# Altium PCB LXF1768.PcbDoc (part 5 of 5)
Units mil, origin at the board's own origin, x right, y up, seen from the top; angles counter-clockwise.
Board outline 3899 x 3079 mil, 2 copper layers (Top Layer, Bottom Layer); 52 components, 108 nets, 388 pads, 52 vias.
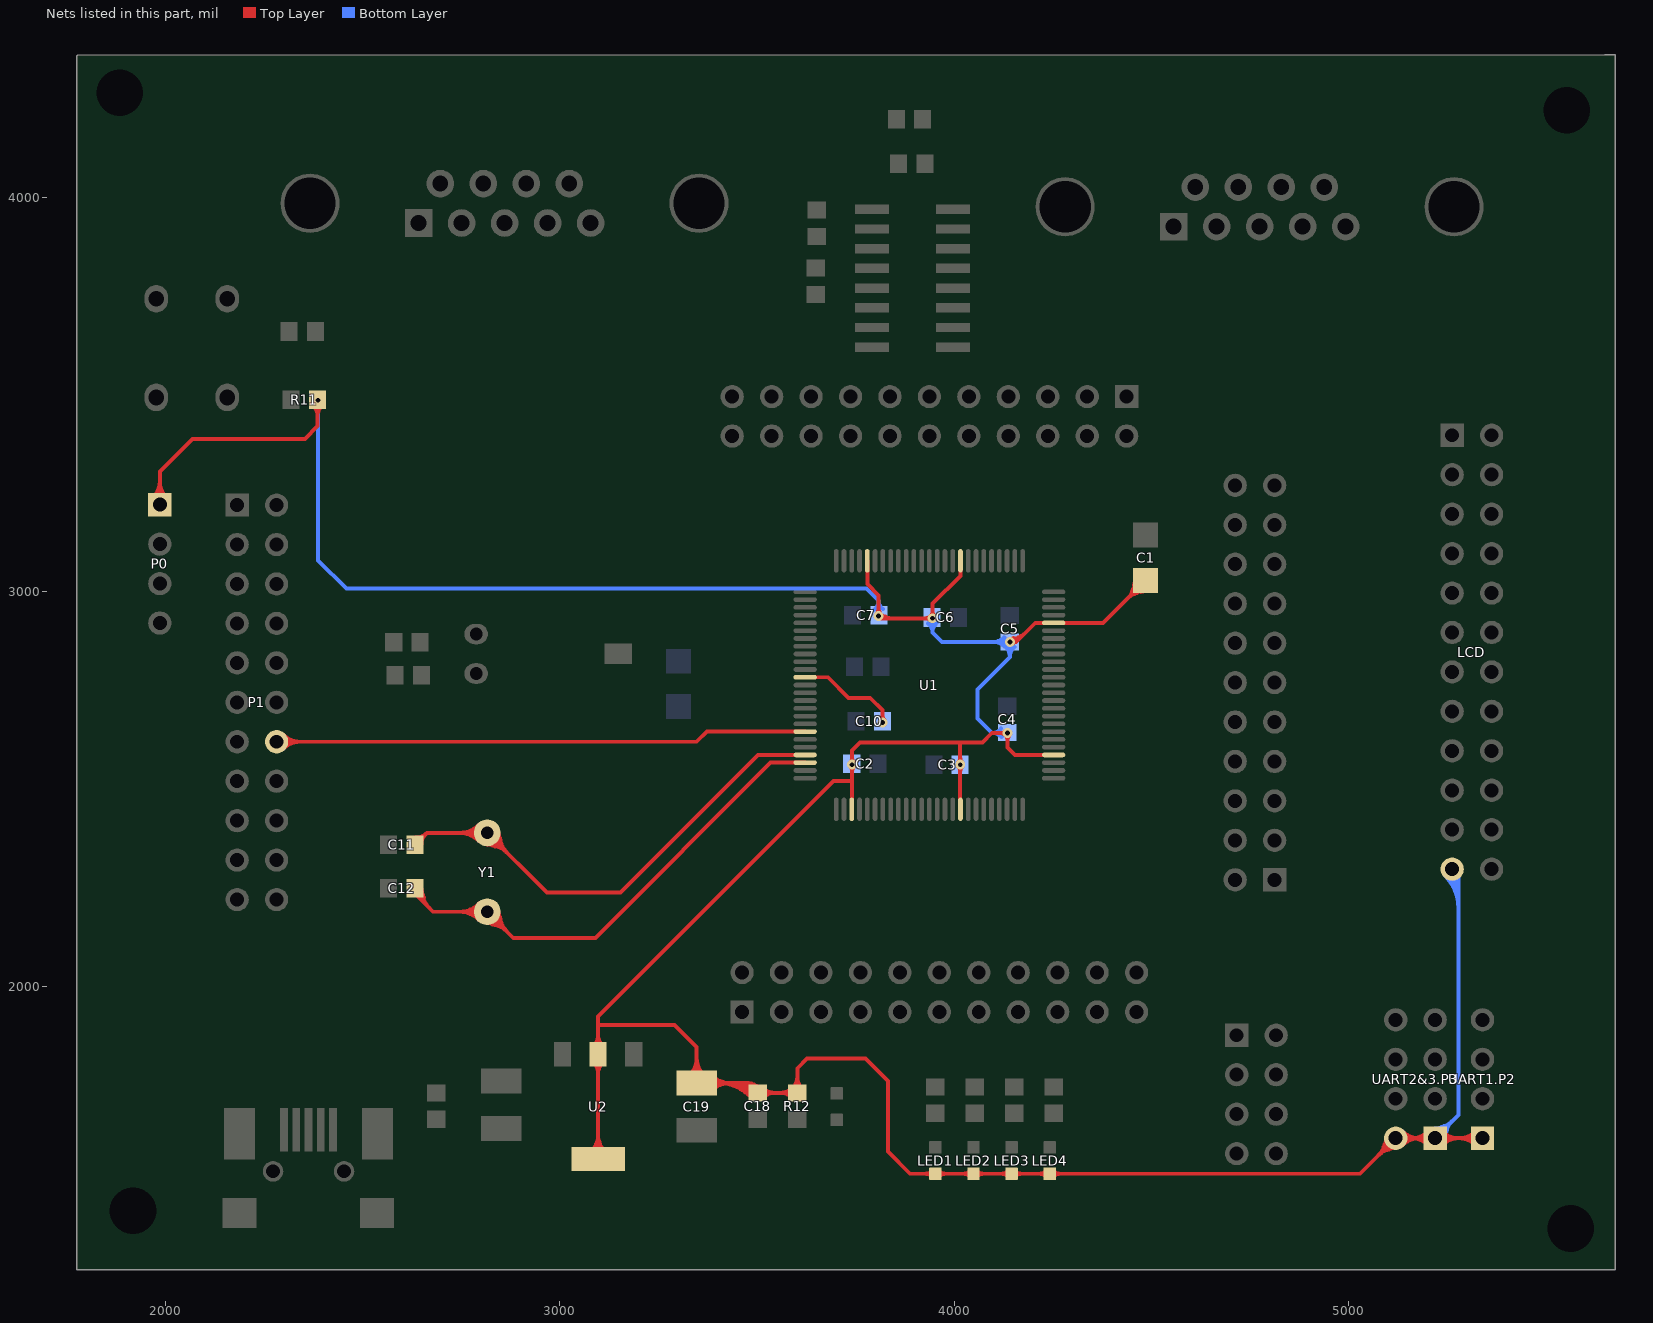
[diagram p5: the nets of this part, all layers, seen from the top]

## Via types
v1: diameter 25, hole 12, Top Layer to Bottom Layer, 27 vias
v2: diameter 24, hole 12, Top Layer to Bottom Layer, 25 vias

## Nets (pads, with @x,y where several pads share a name; then routed paths per layer and width w, separated by ;. In a path a pad name is that pad's centre, name@x,y a point inside that pad or via, vN(x,y) a via of type N, cw(c..) or ccw(c..) an arc to the next point about the centre after c; other vN are vias at no path point) (continued)
VBAT: P1.14 U1.19 | length 1646.8
  Top Layer w10: P1.14@2282,2620 3347,2620 3372.67,2645.67 U1.19@3622,2645.67 ; 2317.07,2620 cw(c2317.07,2655.07) 2292.27,2630.27 ccw(c2317.07,2655.07) 2317.07,2620 ; 2317.07,2620 ccw(c2317.07,2584.93) 2292.27,2609.73 cw(c2317.07,2584.93) 2317.07,2620 ; 2341.21,2620 cw(c2341.21,2679.21) 2299.34,2637.34 ccw(c2341.21,2679.21) 2341.21,2620 ; 2341.21,2620 ccw(c2341.21,2560.79) 2299.34,2602.66 cw(c2341.21,2560.79) 2341.21,2620
VDD3.3: C1.1 C2.1 C3.1 C4.1 C5.1 C6.1 C7.1 C18.1 C19.1 LCD.23 LED1.1 LED2.1 LED3.1 LED4.1 P0.1 pad.EndPad@2385.93,3487 pad.StartPad@3741,2562 R11.2 R12.1 U1.28 U1.42 U1.54 U1.71 U1.84 U1.96 U2.2 U2.4 UART1.P2.1 UART2&3.P3.1 UART2&3.P3.2 | length 17897.7
  Top Layer w10: P0.1@1986,3221 1986,3305 2069,3388 2354,3388 2385.93,3419.93 pad.EndPad@2385.93,3487 ; U2.4@3097,1562.13 U2.2@3097,1827.87 U2.2@3097,1846 ; 3099,1902 3291,1902 3347,1846 C19.1@3347,1755 3477,1755 ; 3453.76,1749.51 ccw(c3478.22,1791.51) C18.1@3494.47,1745.7 ; 3457.68,1739.69 ccw(c3471.68,1759.63) C18.1@3488.52,1742.03 ; 3466.14,1753.3 cw(c3448.36,1722.51) C18.1@3483.55,1727.61 ; 3467.64,1732.7 ccw(c3480.25,1750.67) C18.1@3495.43,1734.81 ; 3472.4,1738.65 ccw(c3487.67,1764.87) C18.1@3497.81,1736.27 ; 3473.59,1749 ccw(c3488.17,1774.26) C18.1@3495.72,1746.09 ; 3475.47,1736.86 cw(c3466.29,1721.1) C18.1@3483.93,1725.75 ; 3477.6,1725.71 ccw(c3488.83,1741.7) C18.1@3502.35,1727.58 ; C18.1@3488.44,1751.58 cw(c3481.32,1739.26) C18.1@3494.07,1732.95 ; U1.28@3740.11,2448.82 3741,2449.71 3741,2521 ; U1.96@3779.48,3078.74 3779.48,3019.52 3808,2991 v1(3808,2939) 3814,2933 v1(3945,2933) 3945,2970 4015.7,3040.7 U1.84@4015.7,3078.74 ; v1@3813.7,2934.13 cw(c3821.71,2927.28) 3826.98,2936.41 ; U1.42@4015.7,2448.82 4015,2449.52 v1(4015,2562) 4015,2618 ; v1@4138.83,2874.25 cw(c4155.03,2864.9) 4150.19,2882.96 ; v1(4141,2873) 4157,2873 ; v1@4147.5,2869.25 cw(c4184.6,2847.83) 4173.51,2889.21 ; U1.54@4251.92,2586.61 4153.39,2586.61 4135,2605 v1(4135,2642) 4095,2642 4071,2618 4015,2618 ; 4451.03,3001.1 cw(c4493.02,2989.84) C1.1@4484.3,3032.43 ; C1.1@4455.22,3016.73 cw(c4489.39,3007.57) C1.1@4482.29,3042.23 ; 4457.1,2995.03 ccw(c4445.84,3037.02) C1.1@4488.43,3028.3 ; C1.1@4472.73,2999.22 ccw(c4463.57,3033.39) C1.1@4498.23,3026.29 ; C1.1@4485,3029 4377.26,2921.26 U1.71@4251.92,2921.26 4205.26,2921.26 4157,2873 ; 5088.48,1592.65 cw(c5125.61,1582.7) UART2&3.P3.2@5117.9,1620.36 ; 5096.65,1584.48 ccw(c5086.7,1621.61) UART2&3.P3.2@5124.36,1613.9 ; UART1.P2.1@5339,1615 UART2&3.P3.1@5219,1615 UART2&3.P3.2@5119,1615 5028.85,1524.85 LED4.1@4241.98,1524.85 LED3.1@4145.31,1524.85 LED2.1@4048.65,1524.85 LED1.1@3951.98,1524.85 3888.15,1524.85 3832,1581 3832,1760 3775,1817 3627,1817 3602,1792 R12.1@3602,1730 C18.1@3502,1730 3477,1755 ; 1986,3256.07 cw(c1950.93,3256.07) 1975.73,3231.27 ccw(c1950.93,3256.07) 1986,3256.07 ; 1986,3256.07 ccw(c2021.07,3256.07) 1996.27,3231.27 cw(c2021.07,3256.07) 1986,3256.07 ; 1986,3280.21 cw(c1926.79,3280.21) 1968.66,3238.34 ccw(c1926.79,3280.21) 1986,3280.21 ; 1986,3280.21 ccw(c2045.21,3280.21) 2003.34,3238.34 cw(c2045.21,3280.21) 1986,3280.21 ; 2385.93,3444.83 cw(c2426.13,3444.83) 2397.7,3473.26 ccw(c2426.13,3444.83) 2385.93,3444.83 ; 2385.93,3444.83 ccw(c2345.72,3444.83) 2374.15,3473.26 cw(c2345.72,3444.83) 2385.93,3444.83 ; 3097,1599.57 cw(c3059.55,1599.57) 3086.03,1573.09 ccw(c3059.55,1599.57) 3097,1599.57 ; 3097,1599.57 ccw(c3134.45,1599.57) 3107.97,1573.09 cw(c3134.45,1599.57) 3097,1599.57 ; 3097,1623.72 cw(c3035.41,1623.72) 3078.96,1580.17 ccw(c3035.41,1623.72) 3097,1623.72 ; 3097,1623.72 ccw(c3158.59,1623.72) 3115.04,1580.17 cw(c3158.59,1623.72) 3097,1623.72 ; 3097,1778.81 cw(c3137.21,1778.81) 3108.78,1807.24 ccw(c3137.21,1778.81) 3097,1778.81 ; 3097,1778.81 ccw(c3056.79,1778.81) 3085.22,1807.24 cw(c3056.79,1778.81) 3097,1778.81 ; 3097,1861 cw(c3087.65,1861) 3091.01,1852.27 ccw(c3087.65,1861) 3097,1861 ; 3097,1861 ccw(c3106.35,1861) 3102.99,1852.27 cw(c3106.35,1861) 3097,1861 ; 3097,1861 3097,1924 3694,2521 3741,2521 ; 3097,1876.94 cw(c3056.79,1876.94) 3085.22,1848.51 ccw(c3056.79,1876.94) 3097,1876.94 ; 3097,1876.94 ccw(c3137.21,1876.94) 3108.78,1848.51 cw(c3137.21,1876.94) 3097,1876.94 ; 3347,1794.82 cw(c3307.18,1794.82) 3335.34,1766.66 ccw(c3307.18,1794.82) 3347,1794.82 ; 3347,1794.82 ccw(c3386.82,1794.82) 3358.66,1766.66 cw(c3386.82,1794.82) 3347,1794.82 ; 3347,1818.97 cw(c3283.03,1818.97) 3328.26,1773.74 ccw(c3283.03,1818.97) 3347,1818.97 ; 3347,1818.97 ccw(c3410.97,1818.97) 3365.74,1773.74 cw(c3410.97,1818.97) 3347,1818.97 ; 3406.51,1755 cw(c3406.51,1794.82) 3378.35,1766.66 ccw(c3406.51,1794.82) 3406.51,1755 ; 3406.51,1755 ccw(c3406.51,1715.18) 3378.35,1743.34 cw(c3406.51,1715.18) 3406.51,1755 ; 3430.65,1755 cw(c3430.65,1818.97) 3385.42,1773.74 ccw(c3430.65,1818.97) 3430.65,1755 ; 3430.65,1755 ccw(c3430.65,1691.03) 3385.42,1736.26 cw(c3430.65,1691.03) 3430.65,1755 ; 3477,1755 cw(c3459.8,1737.8) 3483.68,1733.17 ccw(c3459.8,1737.8) 3477,1755 ; 3477,1755 ccw(c3497.34,1775.34) 3499.05,1746.62 cw(c3497.34,1775.34) 3477,1755 ; 3544.17,1730 cw(c3544.17,1770.21) 3515.74,1741.78 ccw(c3544.17,1770.21) 3544.17,1730 ; 3544.17,1730 ccw(c3544.17,1689.79) 3515.74,1718.22 cw(c3544.17,1689.79) 3544.17,1730 ; 3559.83,1730 cw(c3559.83,1689.79) 3588.26,1718.22 ccw(c3559.83,1689.79) 3559.83,1730 ; 3559.83,1730 ccw(c3559.83,1770.21) 3588.26,1741.78 cw(c3559.83,1770.21) 3559.83,1730 ; 3602,1770.21 cw(c3561.79,1770.21) 3590.22,1741.78 ccw(c3561.79,1770.21) 3602,1770.21 ; 3602,1770.21 ccw(c3642.21,1770.21) 3613.78,1741.78 cw(c3642.21,1770.21) 3602,1770.21 ; 3741,2521 v1(3741,2562) 3741,2598 3761,2618 4015,2618 ; 3741,2543.89 cw(c3759.11,2543.89) 3746.3,2556.7 ccw(c3759.11,2543.89) 3741,2543.89 ; 3741,2543.89 ccw(c3722.89,2543.89) 3735.7,2556.7 cw(c3722.89,2543.89) 3741,2543.89 ; 3741,2580.11 cw(c3722.89,2580.11) 3735.7,2567.3 ccw(c3722.89,2580.11) 3741,2580.11 ; 3741,2580.11 ccw(c3759.11,2580.11) 3746.3,2567.3 cw(c3759.11,2580.11) 3741,2580.11 ; 3808,2957.11 cw(c3789.89,2957.11) 3802.7,2944.3 ccw(c3789.89,2957.11) 3808,2957.11 ; 3808,2957.11 ccw(c3826.11,2957.11) v1@3813.3,2944.3 ; 3808,2957.11 ccw(c3826.11,2957.11) v1@3813.3,2944.3 ; v1@3813.3,2944.3 ccw(c3840.59,2971.59) 3840.59,2933 cw(c3840.59,2971.59) v1@3813.3,2944.3 ; 3926.03,1524.85 cw(c3926.03,1498.9) 3944.38,1517.25 ccw(c3926.03,1498.9) 3926.03,1524.85 ; 3926.03,1524.85 ccw(c3926.03,1550.8) 3944.38,1532.45 cw(c3926.03,1550.8) 3926.03,1524.85 ; 3926.89,2933 cw(c3926.89,2914.89) 3939.7,2927.7 ccw(c3926.89,2914.89) 3926.89,2933 ; 3926.89,2933 ccw(c3926.89,2951.11) v1@3939.7,2938.3 ; 3926.89,2933 ccw(c3926.89,2951.11) v1@3939.7,2938.3 ; v1@3939.7,2938.3 ccw(c3926.89,2951.11) 3945,2951.11 ; v1@3939.7,2938.3 ccw(c3926.89,2951.11) 3945,2951.11 ; 3945,2951.11 ccw(c3963.11,2951.11) 3950.3,2938.3 cw(c3963.11,2951.11) 3945,2951.11 ; 3977.93,1524.85 cw(c3977.93,1550.8) 3959.58,1532.45 ccw(c3977.93,1550.8) 3977.93,1524.85 ; 3977.93,1524.85 ccw(c3977.93,1498.9) 3959.58,1517.25 cw(c3977.93,1498.9) 3977.93,1524.85 ; 4015,2543.89 cw(c4033.11,2543.89) 4020.3,2556.7 ccw(c4033.11,2543.89) 4015,2543.89 ; 4015,2543.89 ccw(c3996.89,2543.89) 4009.7,2556.7 cw(c3996.89,2543.89) 4015,2543.89 ; 4015,2580.11 cw(c3996.89,2580.11) 4009.7,2567.3 ccw(c3996.89,2580.11) 4015,2580.11 ; 4015,2580.11 ccw(c4033.11,2580.11) 4020.3,2567.3 cw(c4033.11,2580.11) 4015,2580.11 ; 4022.7,1524.85 cw(c4022.7,1498.9) 4041.05,1517.25 ccw(c4022.7,1498.9) 4022.7,1524.85 ; 4022.7,1524.85 ccw(c4022.7,1550.8) 4041.05,1532.45 cw(c4022.7,1550.8) 4022.7,1524.85 ; 4074.6,1524.85 cw(c4074.6,1550.8) 4056.25,1532.45 ccw(c4074.6,1550.8) 4074.6,1524.85 ; 4074.6,1524.85 ccw(c4074.6,1498.9) 4056.25,1517.25 cw(c4074.6,1498.9) 4074.6,1524.85 ; 4116.89,2642 cw(c4116.89,2623.89) v1@4129.7,2636.7 ; 4116.89,2642 ccw(c4116.89,2660.11) 4129.7,2647.3 cw(c4116.89,2660.11) 4116.89,2642 ; 4116.89,2642 cw(c4116.89,2623.89) v1@4129.7,2636.7 ; 4119.37,1524.85 cw(c4119.37,1498.9) 4137.72,1517.25 ccw(c4119.37,1498.9) 4119.37,1524.85 ; 4119.37,1524.85 ccw(c4119.37,1550.8) 4137.72,1532.45 cw(c4119.37,1550.8) 4119.37,1524.85 ; v1@4129.7,2636.7 cw(c4116.89,2623.89) 4135,2623.89 ; v1@4129.7,2636.7 cw(c4116.89,2623.89) 4135,2623.89 ; 4135,2623.89 cw(c4153.11,2623.89) 4140.3,2636.7 ccw(c4153.11,2623.89) 4135,2623.89 ; 4157,2873 cw(c4157,2886.31) 4146.76,2877.8 ccw(c4157,2886.31) 4157,2873 ; 4157,2873 ccw(c4157,2859.69) 4146.76,2868.2 cw(c4157,2859.69) 4157,2873 ; 4171.26,1524.85 cw(c4171.26,1550.8) 4152.91,1532.45 ccw(c4171.26,1550.8) 4171.26,1524.85 ; 4171.26,1524.85 ccw(c4171.26,1498.9) 4152.91,1517.25 cw(c4171.26,1498.9) 4171.26,1524.85 ; 4216.03,1524.85 cw(c4216.03,1498.9) 4234.38,1517.25 ccw(c4216.03,1498.9) 4216.03,1524.85 ; 4216.03,1524.85 ccw(c4216.03,1550.8) 4234.38,1532.45 cw(c4216.03,1550.8) 4216.03,1524.85 ; 4267.93,1524.85 cw(c4267.93,1550.8) 4249.58,1532.45 ccw(c4267.93,1550.8) 4267.93,1524.85 ; 4267.93,1524.85 ccw(c4267.93,1498.9) 4249.58,1517.25 cw(c4267.93,1498.9) 4267.93,1524.85 ; 4439.77,2983.77 cw(c4485,2938.54) 4485,3002.5 ccw(c4485,2938.54) 4439.77,2983.77 ; 4439.77,2983.77 ccw(c4394.54,3029) 4458.5,3029 cw(c4394.54,3029) 4439.77,2983.77 ; C1.1@4456.84,3000.84 cw(c4485,2972.68) 4485,3012.5 ccw(c4485,2972.68) C1.1@4456.84,3000.84 ; C1.1@4456.84,3000.84 ccw(c4428.68,3029) 4468.5,3029 cw(c4428.68,3029) C1.1@4456.84,3000.84 ; 5077.13,1573.13 cw(c5119,1531.26) 5119,1590.47 ccw(c5119,1531.26) 5077.13,1573.13 ; 5077.13,1573.13 ccw(c5035.26,1615) 5094.47,1615 cw(c5035.26,1615) 5077.13,1573.13 ; 5094.2,1590.2 cw(c5119,1565.4) 5119,1600.47 ccw(c5119,1565.4) 5094.2,1590.2 ; 5094.2,1590.2 ccw(c5069.4,1615) 5104.47,1615 cw(c5069.4,1615) 5094.2,1590.2 ; 5154.07,1615 cw(c5154.07,1650.07) 5129.27,1625.27 ccw(c5154.07,1650.07) 5154.07,1615 ; 5154.07,1615 ccw(c5154.07,1579.93) 5129.27,1604.73 cw(c5154.07,1579.93) 5154.07,1615 ; 5159.79,1615 cw(c5159.79,1555.79) 5201.66,1597.66 ccw(c5159.79,1555.79) 5159.79,1615 ; 5159.79,1615 ccw(c5159.79,1674.21) 5201.66,1632.34 cw(c5159.79,1674.21) 5159.79,1615 ; 5178.21,1615 cw(c5178.21,1674.21) 5136.34,1632.34 ccw(c5178.21,1674.21) 5178.21,1615 ; 5178.21,1615 ccw(c5178.21,1555.79) 5136.34,1597.66 cw(c5178.21,1555.79) 5178.21,1615 ; 5183.93,1615 cw(c5183.93,1579.93) 5208.73,1604.73 ccw(c5183.93,1579.93) 5183.93,1615 ; 5183.93,1615 ccw(c5183.93,1650.07) 5208.73,1625.27 cw(c5183.93,1650.07) 5183.93,1615 ; 5254.07,1615 cw(c5254.07,1650.07) 5229.27,1625.27 ccw(c5254.07,1650.07) 5254.07,1615 ; 5254.07,1615 ccw(c5254.07,1579.93) 5229.27,1604.73 cw(c5254.07,1579.93) 5254.07,1615 ; 5278.21,1615 cw(c5278.21,1674.21) 5236.34,1632.34 ccw(c5278.21,1674.21) 5278.21,1615 ; 5278.21,1615 ccw(c5278.21,1555.79) 5236.34,1597.66 cw(c5278.21,1555.79) 5278.21,1615 ; 5279.79,1615 cw(c5279.79,1555.79) 5321.66,1597.66 ccw(c5279.79,1555.79) 5279.79,1615 ; 5279.79,1615 ccw(c5279.79,1674.21) 5321.66,1632.34 cw(c5279.79,1674.21) 5279.79,1615 ; 5303.93,1615 cw(c5303.93,1579.93) 5328.73,1604.73 ccw(c5303.93,1579.93) 5303.93,1615 ; 5303.93,1615 ccw(c5303.93,1650.07) 5328.73,1625.27 cw(c5303.93,1650.07) 5303.93,1615 ; R11.2@2381.7,3480.7 cw(c2371.48,3470.48) 2385.93,3470.48 ccw(c2371.48,3470.48) R11.2@2381.7,3480.7 ; R11.2@2385.93,3465.31 cw(c2407.69,3465.31) 2392.3,3480.7 ccw(c2407.69,3465.31) R11.2@2385.93,3465.31 ; 3399.47,1755 cw(c3399.47,1629.44) 3488.26,1718.22 ccw(c3399.47,1629.44) 3399.47,1755 ; 3423.61,1755 cw(c3423.61,1653.58) 3495.33,1725.3 ccw(c3423.61,1653.58) 3423.61,1755 ; 3447.76,1755 cw(c3447.76,1677.72) 3502.4,1732.37 ccw(c3447.76,1677.72) 3447.76,1755 ; 3471.9,1755 cw(c3471.9,1701.87) 3509.47,1739.44 ccw(c3471.9,1701.87) 3471.9,1755 ; v1@4141,2870.5 ccw(c4141,2903.09) 4164.05,2880.05 cw(c4141,2903.09) v1@4141,2870.5 ; v1@4141,2880.5 ccw(c4141,2937.23) 4181.12,2897.12 cw(c4141,2937.23) v1@4141,2880.5
  Bottom Layer w10: v1(2387,3486) 2387,3080 2459,3008 3778,3008 3808,2978 ; v1(3808,2939) 3808,2978 ; v1(3945,2933) 3945,2897 ; v1(4135,2642) 4096,2642 ; UART2&3.P3.1@5213.64,1616.1 cw(c5251.3,1608.39) 5241.35,1645.52 ; UART2&3.P3.1@5219,1615 5278,1674 5278,2281 LCD.23@5262,2297 ; UART2&3.P3.1@5220.1,1609.64 ccw(c5212.39,1647.3) 5249.52,1637.35 ; LCD.23@5263.49,2272.52 cw(c5264.21,2260.66) 5274.5,2266.6 cw(c5281.68,2270.74) LCD.23@5276.71,2277.37 ; 5265.43,2262.99 cw(c5279.95,2271.37) LCD.23@5270.33,2285.1 ; 5270.89,2253.53 cw(c5286.24,2262.4) LCD.23@5276.07,2276.91 ; 2387,3467.89 cw(c2405.11,3467.89) 2392.3,3480.7 ccw(c2405.11,3467.89) 2387,3467.89 ; 2387,3467.89 ccw(c2368.89,3467.89) 2381.7,3480.7 cw(c2368.89,3467.89) 2387,3467.89 ; C7.1@3808,2957.11 cw(c3789.89,2957.11) 3802.7,2944.3 ccw(c3789.89,2957.11) C7.1@3808,2957.11 ; C7.1@3808,2957.11 ccw(c3826.11,2957.11) 3813.3,2944.3 cw(c3826.11,2957.11) C7.1@3808,2957.11 ; 3808,2978 cw(c3777.63,2978) 3797.89,2955.37 ccw(c3777.63,2978) 3808,2978 ; 3808,2978 ccw(c3834.93,2978) 3818.91,2956.35 cw(c3834.93,2978) 3808,2978 ; 3945,2896.99 cw(c3977.67,2896.99) 3955.37,2920.86 ccw(c3977.67,2896.99) 3945,2896.99 ; 3945,2896.99 ccw(c3916.03,2896.99) 3933.79,2919.87 cw(c3916.03,2896.99) 3945,2896.99 ; 3945,2897 3969,2873 v1(4141,2873) 4141,2835 ; C6.1@3945,2914.89 cw(c3963.11,2914.89) 3950.3,2927.7 ccw(c3963.11,2914.89) C6.1@3945,2914.89 ; C6.1@3945,2914.89 ccw(c3926.89,2914.89) 3939.7,2927.7 cw(c3926.89,2914.89) C6.1@3945,2914.89 ; 4096,2642 cw(c4096,2609.36) 4119.86,2631.64 ccw(c4096,2609.36) 4096,2642 ; 4096,2642 ccw(c4096,2670.94) 4118.87,2653.21 cw(c4096,2670.94) 4096,2642 ; 4096,2642 4059,2679 4059,2753 4141,2835 ; 4098.83,2873 cw(c4098.83,2832.79) 4127.26,2861.22 ccw(c4098.83,2832.79) 4098.83,2873 ; 4098.83,2873 ccw(c4098.83,2913.21) 4127.26,2884.78 cw(c4098.83,2913.21) 4098.83,2873 ; C4.1@4116.89,2642 cw(c4116.89,2623.89) 4129.7,2636.7 ccw(c4116.89,2623.89) C4.1@4116.89,2642 ; C4.1@4116.89,2642 ccw(c4116.89,2660.11) 4129.7,2647.3 cw(c4116.89,2660.11) C4.1@4116.89,2642 ; C5.1@4122.89,2873 cw(c4122.89,2854.89) C5.1@4135.7,2867.7 ; C5.1@4122.89,2873 ccw(c4122.89,2891.11) 4135.7,2878.3 cw(c4122.89,2891.11) C5.1@4122.89,2873 ; C5.1@4122.89,2873 cw(c4122.89,2854.89) C5.1@4135.7,2867.7 ; C5.1@4135.7,2867.7 cw(c4122.89,2854.89) C5.1@4141,2854.89 ; C5.1@4135.7,2867.7 cw(c4122.89,2854.89) C5.1@4141,2854.89 ; 4141,2835 cw(c4176.02,2835) 4152.29,2860.75 ccw(c4176.02,2835) 4141,2835 ; 4141,2835 ccw(c4105.98,2835) 4129.71,2860.75 cw(c4105.98,2835) 4141,2835 ; C5.1@4141,2854.89 cw(c4159.11,2854.89) 4146.3,2867.7 ccw(c4159.11,2854.89) C5.1@4141,2854.89 ; UART2&3.P3.1@5243.8,1639.8 cw(c5219,1664.6) 5219,1629.53 ccw(c5219,1664.6) UART2&3.P3.1@5243.8,1639.8 ; UART2&3.P3.1@5243.8,1639.8 ccw(c5268.6,1615) 5233.53,1615 cw(c5268.6,1615) UART2&3.P3.1@5243.8,1639.8 ; 5260.87,1656.87 cw(c5219,1698.74) 5219,1639.53 ccw(c5219,1698.74) 5260.87,1656.87 ; 5260.87,1656.87 ccw(c5302.74,1615) 5243.53,1615 cw(c5302.74,1615) 5260.87,1656.87 ; LCD.23@5244.66,2279.66 cw(c5164.16,2199.16) 5278,2199.16 ccw(c5164.16,2199.16) LCD.23@5244.66,2279.66 ; LCD.23@5251.73,2286.73 cw(c5188.3,2223.3) 5278,2223.3 ccw(c5188.3,2223.3) LCD.23@5251.73,2286.73 ; LCD.23@5258.8,2293.8 cw(c5212.44,2247.44) 5278,2247.44 ccw(c5212.44,2247.44) LCD.23@5258.8,2293.8 ; LCD.23@5265.87,2300.87 cw(c5236.58,2271.58) 5278,2271.58 ccw(c5236.58,2271.58) LCD.23@5265.87,2300.87
VREF: C10.1 U1.12 | length 318.5
  Top Layer w10: U1.12@3622,2783.47 3679.53,2783.47 3732,2731 3787,2731 3818,2700 v1(3818,2669) ; 3818,2687.11 cw(c3799.89,2687.11) 3812.7,2674.3 ccw(c3799.89,2687.11) 3818,2687.11 ; 3818,2687.11 ccw(c3836.11,2687.11) 3823.3,2674.3 cw(c3836.11,2687.11) 3818,2687.11
XTAL1: C11.2 U1.22 Y1.2 | length 2259.8
  Top Layer w10: C11.2@2632.93,2359 2662.93,2389 ; Y1.2@2805.22,2386.79 ccw(c2846.16,2395.18) 2835.34,2354.82 ; Y1.2@2815.02,2388.8 ccw(c2863.88,2398.81) 2850.97,2350.63 ; Y1.2@2816.2,2389.98 cw(c2806.19,2341.12) 2854.37,2354.03 ; Y1.2@2818.21,2399.78 cw(c2809.82,2358.84) 2850.18,2369.66 ; U1.22@3622,2586.61 3502.61,2586.61 3154,2238 2967,2238 Y1.2@2816,2389 2662.93,2389 ; 2662.93,2389 cw(c2635.34,2416.59) 2633.65,2377.61 ccw(c2635.34,2416.59) 2662.93,2389 ; 2745.99,2389 cw(c2745.99,2318.99) 2795.49,2368.49 ccw(c2745.99,2318.99) 2745.99,2389 ; 2745.99,2389 ccw(c2745.99,2459.01) 2795.49,2409.51 cw(c2745.99,2459.01) 2745.99,2389 ; 2770.13,2389 cw(c2770.13,2343.13) 2802.56,2375.56 ccw(c2770.13,2343.13) 2770.13,2389 ; 2770.13,2389 ccw(c2770.13,2434.87) 2802.56,2402.44 cw(c2770.13,2434.87) 2770.13,2389 ; 2848.44,2356.56 cw(c2880.87,2389) 2835,2389 ccw(c2880.87,2389) 2848.44,2356.56 ; 2848.44,2356.56 ccw(c2816,2324.13) 2816,2370 cw(c2816,2324.13) 2848.44,2356.56 ; 2865.51,2339.49 cw(c2915.01,2389) 2845,2389 ccw(c2915.01,2389) 2865.51,2339.49 ; 2865.51,2339.49 ccw(c2816,2289.99) 2816,2360 cw(c2816,2289.99) 2865.51,2339.49 ; C11.2@2649.58,2360.97 cw(c2685.04,2360.97) 2659.97,2386.04 ccw(c2685.04,2360.97) C11.2@2649.58,2360.97
XTAL2: C12.2 U1.23 Y1.1 | length 2391.1
  Top Layer w10: C12.2@2632.93,2249 2632.93,2235.07 2679,2189 Y1.1@2816,2189 2882,2123 3090,2123 3533.93,2566.93 U1.23@3622,2566.93 ; C12.2@2634.27,2250.1 cw(c2619.44,2216.05) 2655.31,2225.66 ; 2645.53,2224.85 cw(c2663.17,2229.57) C12.2@2647.35,2238.7 ; Y1.1@2805.22,2186.79 ccw(c2846.16,2195.18) 2835.34,2154.82 ; Y1.1@2815.02,2188.8 ccw(c2863.88,2198.81) 2850.97,2150.63 ; Y1.1@2816.2,2189.98 cw(c2806.19,2141.12) 2854.37,2154.03 ; Y1.1@2818.21,2199.78 cw(c2809.82,2158.84) 2850.18,2169.66 ; 2745.99,2189 cw(c2745.99,2118.99) 2795.49,2168.49 ccw(c2745.99,2118.99) 2745.99,2189 ; 2745.99,2189 ccw(c2745.99,2259.01) 2795.49,2209.51 cw(c2745.99,2259.01) 2745.99,2189 ; 2770.13,2189 cw(c2770.13,2143.13) 2802.56,2175.56 ccw(c2770.13,2143.13) 2770.13,2189 ; 2770.13,2189 ccw(c2770.13,2234.87) 2802.56,2202.44 cw(c2770.13,2234.87) 2770.13,2189 ; 2848.44,2156.56 cw(c2880.87,2189) 2835,2189 ccw(c2880.87,2189) 2848.44,2156.56 ; 2848.44,2156.56 ccw(c2816,2124.13) 2816,2170 cw(c2816,2124.13) 2848.44,2156.56 ; 2865.51,2139.49 cw(c2915.01,2189) 2845,2189 ccw(c2915.01,2189) 2865.51,2139.49 ; 2865.51,2139.49 ccw(c2816,2089.99) 2816,2160 cw(c2816,2089.99) 2865.51,2139.49 ; C12.2@2639.58,2247.03 ccw(c2684.52,2247.03) 2652.74,2215.26 cw(c2684.52,2247.03) C12.2@2639.58,2247.03 ; C12.2@2649.58,2247.03 ccw(c2718.66,2247.03) 2669.82,2198.18 cw(c2718.66,2247.03) C12.2@2649.58,2247.03
pads on no net: JP1.0 JP1.2 JP1.3 JP1.4 LCD.22 LED1.0 LED2.0 LED3.0 LED4.0 U1.13 UART0.0 UART0.1 UART0.4 UART0.6 UART0.7 UART0.8 UART0.9 UART1.0 UART1.1 UART1.4 UART1.6 UART1.7 UART1.8 UART1.9 V3.3.0 Y2.0

## Polygon pours and split planes (outlines as drawn)
DGND on Top Layer "Top Overlay-No Net" (solid, remove dead copper, pour order 14): 1777,4360 1776,4359 1776,1282 5676,1282 5675,1283 5675,4362
DGND on Bottom Layer "Top Overlay-No Net" (solid, remove dead copper, pour order 16): 1777,4360 1777,1283 1776,1282 5676,1282 5676,4361

## Keep-outs
Keep-Out Layer:
  the board outline again, w10

## Silkscreen, mask and mechanical layers (free items; w line width, h text height)
Top Overlay:
  text "LPC1768" at 2531,3462 h100

## Text inside footprints (layer, text, board x,y; h text height)
LCD: Top Overlay "1" at 5242,3497 h50 r270; Top Overlay "2" at 5342,3497 h50 r270; Top Overlay "23" at 5242,2237 h50 r270; Top Overlay "24" at 5342,2237 h50 r270
LED_P1: Top Overlay "2" at 4796,1976 h50 r270; Top Overlay "1" at 4696,1956 h50 r270; Top Overlay "7" at 4696,1516 h50 r270; Top Overlay "8" at 4796,1516 h50 r270
P1: Top Overlay "22" at 2262,2160 h50 r270; Top Overlay "21" at 2162,2160 h50 r270; Top Overlay "2" at 2262,3320 h50 r270; Top Overlay "1" at 2162,3320 h50 r270
P2: Top Overlay "22" at 4522,2015 h50; Top Overlay "21" at 4522,1915 h50; Top Overlay "2" at 3362,2015 h50; Top Overlay "1" at 3362,1915 h50
P3: Top Overlay "22" at 4732,3330 h50 r90; Top Overlay "21" at 4832,3330 h50 r90; Top Overlay "2" at 4732,2170 h50 r90; Top Overlay "1" at 4832,2170 h50 r90
P4: Top Overlay "22" at 3377,3415 h50 r180; Top Overlay "21" at 3377,3515 h50 r180; Top Overlay "2" at 4537,3415 h50 r180; Top Overlay "1" at 4537,3515 h50 r180
UART2&3.P3: Top Overlay "2" at 5139,1515 h50 r90; Top Overlay "1" at 5239,1535 h50 r90; Top Overlay "7" at 5239,1975 h50 r90; Top Overlay "8" at 5139,1975 h50 r90